# EAGLE board Nusbio.smd (EAGLE 7.2.0)
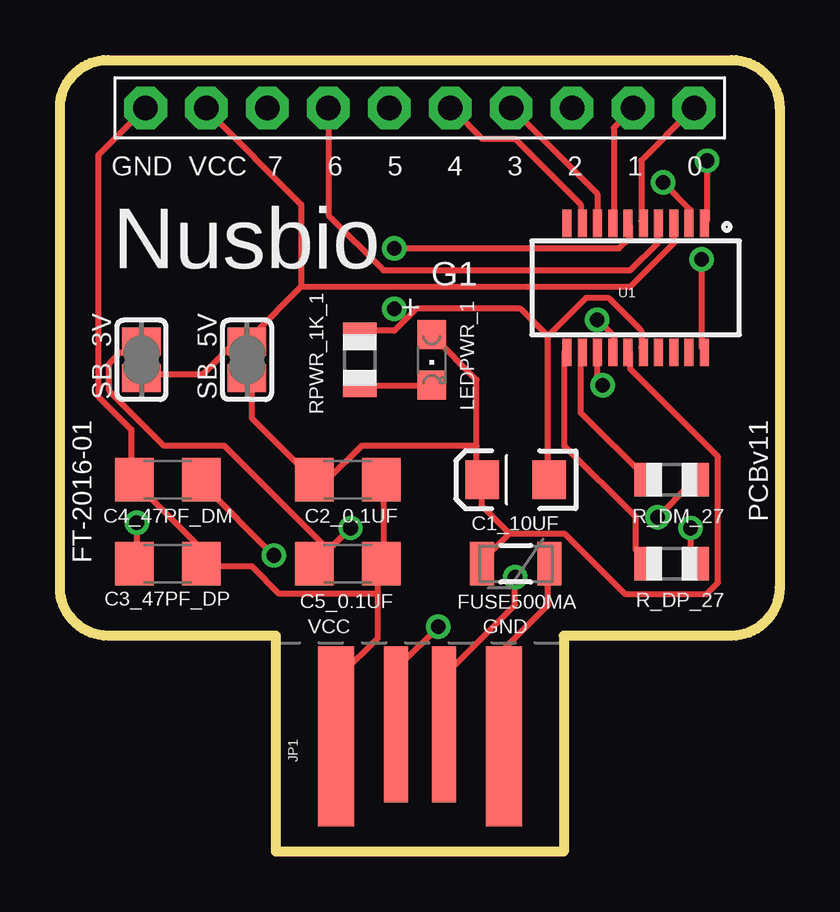
[diagram p0: board, top side]
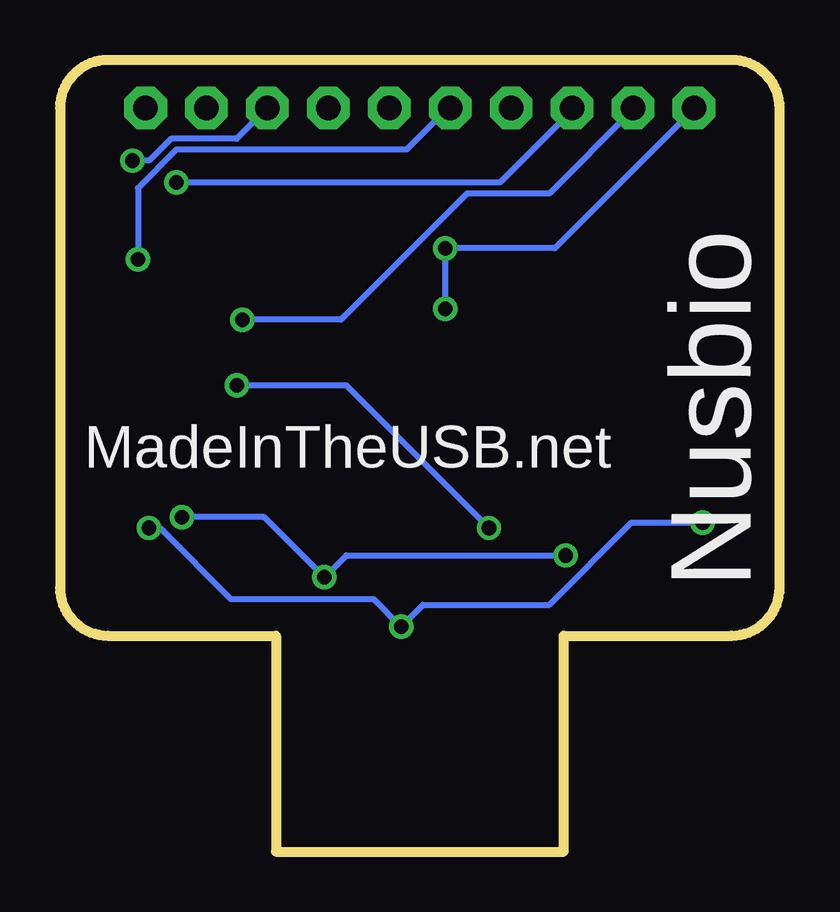
[diagram p1: board, bottom side, seen from below]

Size 30 x 33 mm. Coordinates in mm from the lower left corner, seen from the top.
Outline: 21,9 21,0 9,0 9,9 2,9 arc-90 0,11 0,31 arc-90 2,33 28,33 arc-90 30,31 30,11 arc-90 28,9 21,9
Copper layers (1*16): Top 0.035mm / dielectric 1.5mm / Bottom 0.035mm
Design rules "default": minimum track width 10mil, minimum drill 24mil, track to track 8mil, track to pad 8mil, pad to pad 8mil, via to via 8mil, smd to smd 8mil, copper to edge 40mil, drill to drill 8mil, minimum pad ring 10mil, minimum via ring 8mil, stop-mask expansion 4mil, vias tented up to drill 0mil, thermal gap 10mil

## Footprints (pad centres in the part's own frame; a part is rotated, then mirrored left to right if it is on the bottom)
EIA3216 = smd 1.4 x 1.6: A 1.4,0; C -1.4,0
C1206 = smd 1.6 x 1.8: 1 -1.4,0; 2 1.4,0
PTC-1206 = smd 1 x 1.8: 1 -1.4,0; 2 1.4,0
USB-A-PCB = smd 7.5 x 1.5: 5V -0.2,-3.5; GND -0.2,3.5 | smd 6.5 x 1: USB_M 0.3,-1; USB_P 0.3,1
CHIPLED_0805 = smd 1.2 x 1.2: A 0,-1.05; C 0,1.05
R0805 = smd 1.1 x 1.4: 1 -1,0; 2 1,0
SOLDERJUMPER_REFLOW = smd 1.168 x 1.6: 1 -0.762,0; 2 0.762,0
SSOP20_L = smd 0.381 x 1.143: 1 -2.857,-2.68; 2 -2.223,-2.68; 3 -1.587,-2.68; 4 -0.953,-2.68; 5 -0.318,-2.68; 6 0.318,-2.68; 7 0.953,-2.68; 8 1.587,-2.68; 9 2.223,-2.68; 10 2.857,-2.68; 11 2.857,2.68; 12 2.223,2.68; 13 1.587,2.68; 14 0.953,2.68; 15 0.318,2.68; 16 -0.318,2.68; 17 -0.953,2.68; 18 -1.587,2.68; 19 -2.223,2.68; 20 -2.857,2.68
1X10-BIG = drill 1.016 pad 1.778 octagon: 1 -11.43,0; 2 -8.89,0; 3 -6.35,0; 4 -3.81,0; 5 -1.27,0; 6 1.27,0; 7 3.81,0; 8 6.35,0; 9 8.89,0; 10 11.43,0

## Placement (x,y rotation side)
C1_10UF  10uF  [EIA3216]  19,15.5 180 top
C2_0.1UF  [C1206]  12,15.5 0 top
C3_47PF_DP  [C1206]  4.5,12 180 top
C4_47PF_DM  [C1206]  4.5,15.5 0 top
C5_0.1UF  [C1206]  12,12 0 top
FUSE500MA  PTCSMD  [PTC-1206]  19,12 180 top
JP1  USBPCB  [USB-A-PCB]  15,5 90 top
LEDPWR_1  [CHIPLED_0805]  15.5,20.5 180 top
R_DM_27  [R0805]  25.5,15.5 180 top
R_DP_27  [R0805]  25.5,12 180 top
RPWR_1K_1  [R0805]  12.5,20.5 90 top
SB_3V  [SOLDERJUMPER_REFLOW]  3.4,20.5 90 top
SB_5V  [SOLDERJUMPER_REFLOW]  7.8,20.5 90 top
U1  FTS31XS-U  [SSOP20_L]  24,23.5 180 top
U$1  PINHD-1X10  [1X10-BIG]  15,31 180 top

## Library data of the parts
C1_10UF = SparkFun-Capacitors; PROD_ID: CAP-00811
C2_0.1UF C3_47PF_DP C4_47PF_DM C5_0.1UF LEDPWR_1 R_DM_27 R_DP_27 RPWR_1K_1 U$1 = adafruit
FUSE500MA = SparkFun-PowerIC; PROD_ID: RES-11150
JP1 = SparkFun-Connectors
SB_3V SB_5V = microbuilder
U1 = SparkFun-DigitalIC; PROD_ID: IC-11524

## Nets
GND: C1_10UF.C C2_0.1UF.2 C3_47PF_DP.1 C4_47PF_DM.1 C5_0.1UF.2 JP1.GND RPWR_1K_1.2 U1.6 U1.16 U$1.10
N$1: FUSE500MA.1 JP1.5V
N$2: C5_0.1UF.1 SB_3V.2 U1.13
N$3: LEDPWR_1.C RPWR_1K_1.1
N$4: R_DM_27.2 U1.12
N$5: R_DP_27.2 U1.11
N$6: U1.20 U$1.6
N$7: U1.7 U$1.2
N$8: U1.5 U$1.1
N$9: U1.1 U$1.3
N$10: U1.8 U$1.4
N$11: U1.9 U$1.5
N$12: U1.4 U$1.7
N$13: U1.2 U$1.8
N$14: SB_3V.1 SB_5V.2 U1.3 U1.14 U$1.9
N$15: C3_47PF_DP.2 JP1.USB_P R_DP_27.1
N$16: C4_47PF_DM.2 JP1.USB_M R_DM_27.1
N$17: C1_10UF.A C2_0.1UF.1 FUSE500MA.2 LEDPWR_1.A SB_5V.1 U1.15

## Tracks (layer width: path | path; a pad name or v marks a point on that pad's centre or on a via)
GND  (via drill 0.61)
  Top 0.254: C2_0.1UF.2 13.49,15.32 13.49,12.12 C5_0.1UF.2 13.26,11.89 13.26,10.74 | 13.26,10.74 13.26,8.91 11.66,7.32 11.66,4.8 JP1.GND | 13.26,10.74 9.14,10.74 8,11.89 5.94,11.89 C3_47PF_DP.1 5.71,12.12 5.71,12.8 3.2,15.32 C4_47PF_DM.1 2.97,15.54 2.97,17.6 1.6,18.97 1.6,29.03 3.43,30.86 U$1.10 | 20.34,21.49 21.95,23.09 22.86,23.09 24.23,21.72 24.23,21.03 U1.16 | 20.34,21.49 20.34,15.54 C1_10UF.C | 14.4,22.17 14.86,22.63 19.2,22.63 20.34,21.49 | 14.4,22.17 13.95,21.72 12.57,21.72 RPWR_1K_1.2 | v13.95,25.15 23.32,25.15 23.77,25.6 23.77,26.06 U1.6 | v13.95,22.63 14.4,22.17
  Bottom 0.254: U$1.10 3.66,30.86 9.37,25.15 v13.95,25.15 v13.95,22.63
N$1
  Top 0.254: FUSE500MA.1 20.34,11.89 20.34,10.29 18.52,8.46 18.52,4.8 JP1.5V
N$2  (via drill 0.61)
  Top 0.254: v22.63,19.43 22.4,19.66 22.4,20.8 U1.13 | 11.2,12.57 10.74,12.12 C5_0.1UF.1 11.2,12.57 | 11.2,12.57 v12.12,13.49 | 11.2,12.57 6.86,16.92 4.34,16.92 2.06,19.2 2.06,20.34 2.52,20.8 2.74,20.8 3.2,21.26 SB_3V.2
  Bottom 0.254: v22.63,19.43 18.06,19.43 v12.12,13.49
N$3
  Top 0.254: LEDPWR_1.C 15.32,19.43 12.57,19.43 RPWR_1K_1.1
N$4
  Top 0.254: U1.12 21.72,20.8 21.72,18.29 24.46,15.54 R_DM_27.2
N$5
  Top 0.254: U1.11 21.03,20.8 21.03,16.92 24,13.95 24,12.57 24.46,12.12 R_DP_27.2
N$6  (via drill 0.61)
  Top 0.254: v26.75,24.69 26.75,21.03 U1.20
  Bottom 0.254: v26.75,24.69 26.75,27.66 25.15,29.26 15.54,29.26 13.95,30.86 U$1.6
N$7
  Top 0.254: U1.7 23.09,26.29 23.09,30.18 23.77,30.86 U$1.2
N$8
  Top 0.254: U1.5 24.23,26.29 24.23,28.8 26.29,30.86 U$1.1
N$9  (via drill 0.61)
  Top 0.254: v26.98,28.8 26.98,26.29 U1.1
  Bottom 0.254: v26.98,28.8 26.29,28.8 25.38,29.72 22.63,29.72 21.49,30.86 U$1.3
N$10
  Top 0.254: U1.8 22.4,26.29 22.4,27.43 18.97,30.86 U$1.4
N$11
  Top 0.254: U1.9 21.72,26.29 21.72,26.98 18.97,29.72 17.6,29.72 16.46,30.86 U$1.5
N$12
  Top 0.254: U1.4 24.92,26.06 24.92,25.38 23.77,24.23 13.49,24.23 11.2,26.52 11.2,30.86 U$1.7
N$13  (via drill 0.61)
  Top 0.254: v25.15,27.89 26.29,26.75 26.29,26.29 U1.2
  Bottom 0.254: v25.15,27.89 11.66,27.89 8.69,30.86 U$1.8
N$14  (via drill 0.61)
  Top 0.254: 10.06,23.55 23.77,23.55 25.6,25.38 25.6,26.06 U1.3 | 10.06,23.55 8,21.49 SB_5V.2 7.77,21.26 7.32,21.26 5.94,19.89 3.43,19.89 SB_3V.1 | v22.4,22.17 23.09,21.49 23.09,21.03 U1.14 | 10.06,23.55 10.06,26.98 6.17,30.86 U$1.9
  Bottom 0.254: v22.4,22.17 18.29,22.17 13.03,27.43 9.6,27.43 6.17,30.86 U$1.9
N$15  (via drill 0.61)
  Top 0.254: v26.29,13.49 26.29,12.12 R_DP_27.1 | v15.77,9.37 14.17,7.77 14.17,5.49 JP1.USB_P | v3.2,13.72 3.2,12.12 C3_47PF_DP.2
  Bottom 0.254: v26.29,13.49 25.83,13.49 22.86,10.52 16.92,10.52 v15.77,9.37 14.86,10.29 9.6,10.29 6.17,13.72 v3.2,13.72
N$16  (via drill 0.61)
  Top 0.254: v24.92,13.95 26.29,15.32 R_DM_27.1 | v18.97,11.43 18.97,10.29 16,7.32 16,5.49 JP1.USB_M | v8.91,12.34 5.94,15.32 C4_47PF_DM.2
  Bottom 0.254: v24.92,13.95 21.49,13.95 v18.97,11.43 18.06,12.34 v8.91,12.34
N$17
  Top 0.254: SB_5V.1 8,19.66 8,18.06 10.52,15.54 C2_0.1UF.1 10.74,15.54 11.2,15.54 12.57,16.92 17.37,16.92 | 17.37,16.92 17.37,15.54 C1_10UF.A 17.6,15.32 17.6,14.4 18.75,13.26 | 17.37,16.92 17.37,19.66 15.54,21.49 LEDPWR_1.A | 18.75,13.26 21.03,13.26 23.55,10.74 26.98,10.74 27.43,11.2 27.43,16.46 23.77,20.12 23.77,20.8 U1.15 | 18.75,13.26 17.6,12.12 FUSE500MA.2

## Text on the board
tNames: GND | VCC | 7 | 6 | 5 | 4 | 3 | 2 | 1 | 0 | G1 | Nusbio | + | FT-2016-01 | PCBv11 | VCC | GND
bNames: MadeInTheUSB.net | Nusbio